# Altium PCB 02_to_07.PcbDoc
Units mil, origin at the board's own origin, x right, y up, seen from the top; angles counter-clockwise.
Board outline 629.92 x 1279.53 mil, 2 copper layers (Top Layer, Bottom Layer); 6 components, 7 nets, 25 pads, 0 vias.
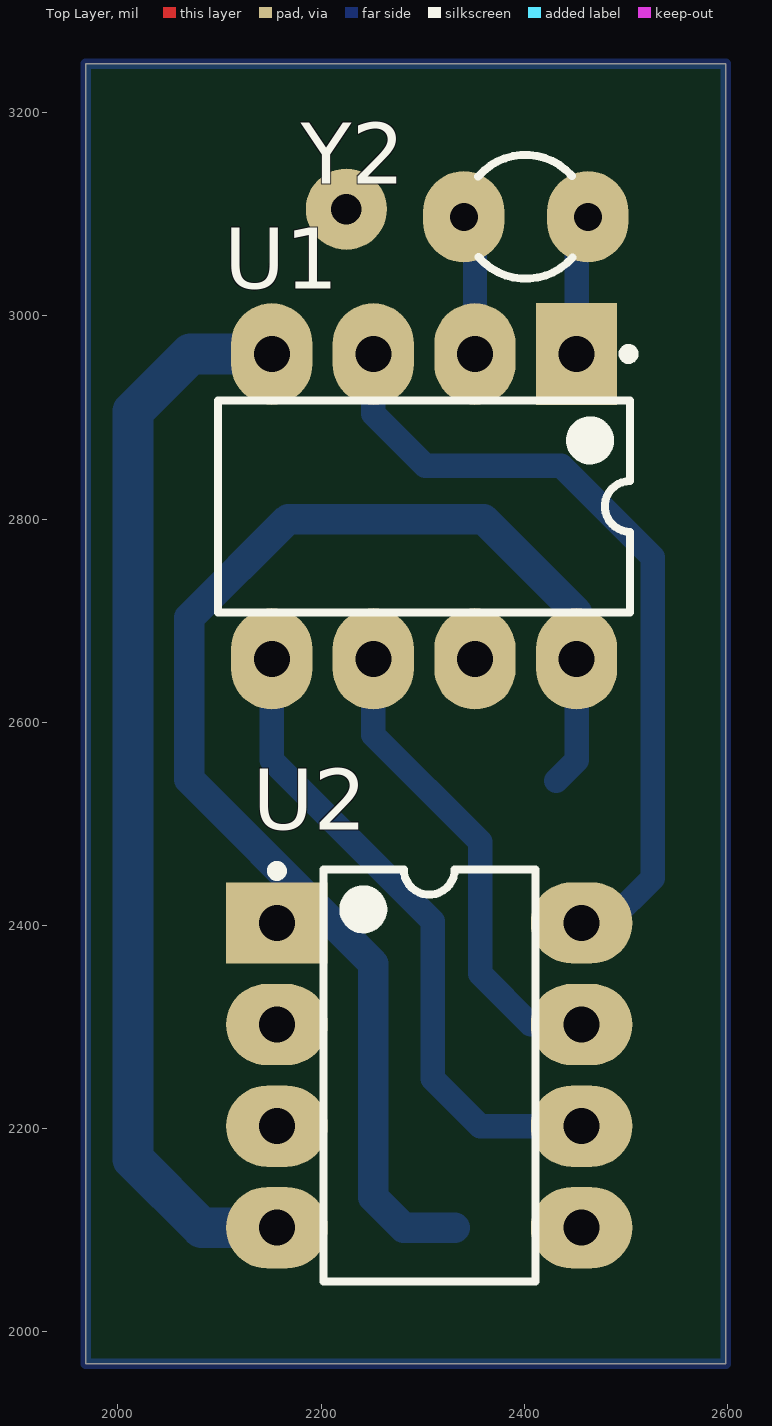
[diagram p0: Top Layer view]
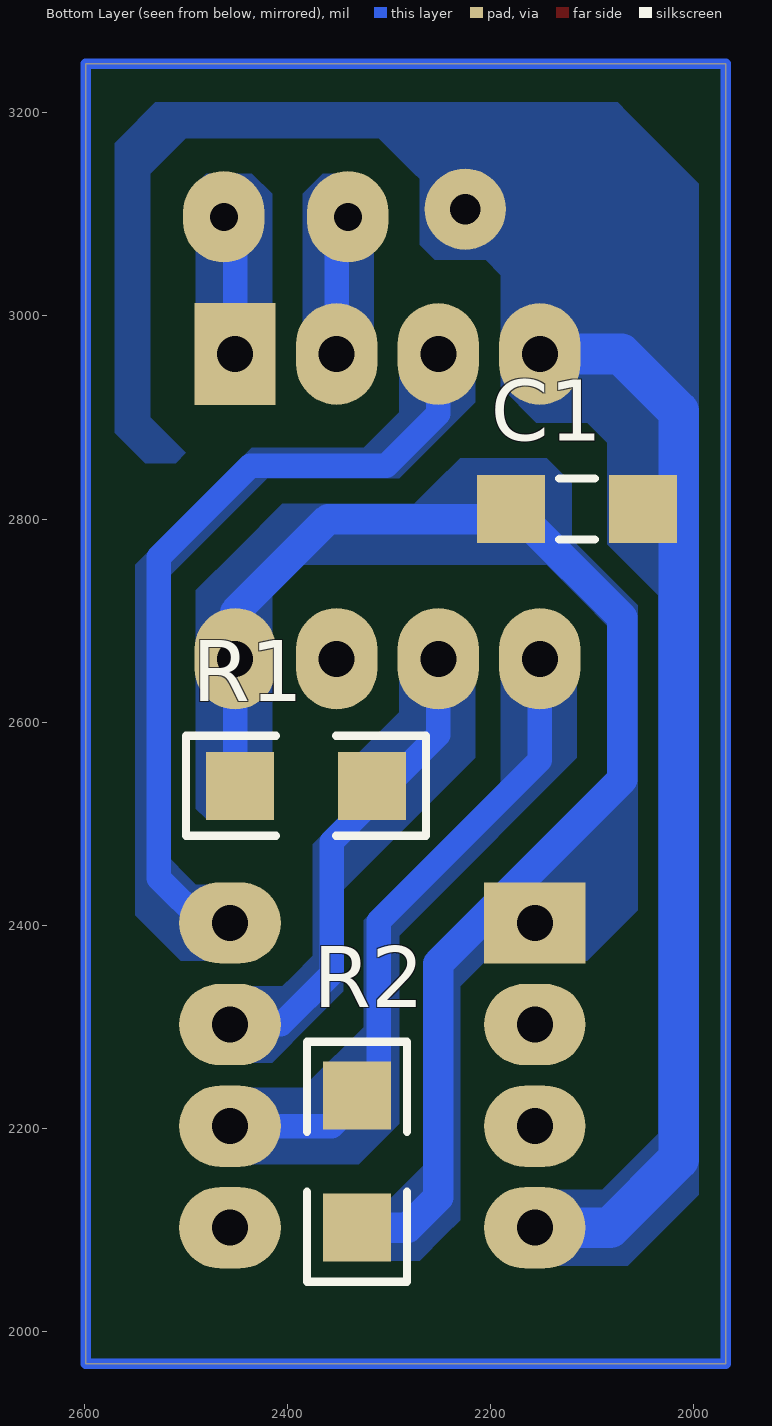
[diagram p1: Bottom Layer view, seen from below]
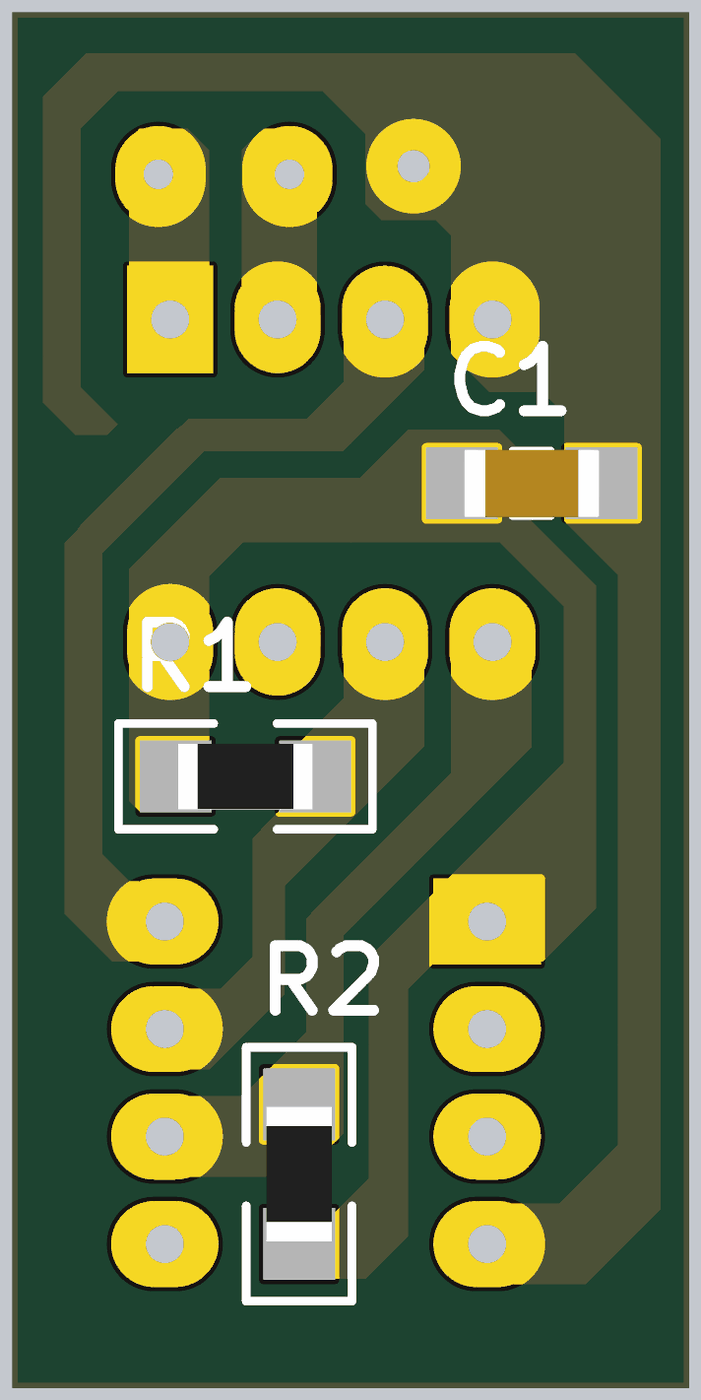
[diagram p2: 3D render of the assembled board from below, using the file's embedded part models]

## Layer stack, top to bottom
Top Layer: signal copper 1.4
Dielectric: dielectric 12.6, FR-4, Dk 4.8
Bottom Layer: signal copper 1.4

## Board outline
1968.5,1968.5 2598.43,1968.5 2598.43,3248.03 1968.5,3248.03

## Design rules (kind name [scope] priority, off if disabled: settings)
Clearance [All] p1: gap=10
PolygonConnect [All] p1: connectstyle=Direct reliefconductorwidth=10 reliefentries=4 polygonreliefangle="90 Angle"
RoutingVias [All] p1: holewidth=28 width=50 viastyle="Through Hole" minholewidth=28 minwidth=50 maxholewidth=28 maxwidth=50
SilkscreenOverComponentPads [All] p1: minsilkscreentomaskgap=10
SolderMaskExpansion [All] p1: expansion=4
Width [All] p1: maxlimit=40 minlimit=18 preferedwidth=24
27 further rules are at their usual default settings.

## Components (designator, comment, footprint, x,y, rotation, side; value= is the part's Value field where it differs from the comment)
C1 ".1uF 1206" C1206 2115,2810 r0 bottom
R1 "1K 1206" R1206 2381.54,2537.44 r0 bottom
R2 "1K 1206" R1206 2331.54,2167.44 r270 bottom
U1 "DS1307" DIP8 2301.54,2812.44 r270 top
U2 "DS1302" DIP8 2306.54,2252.44 r0 top
Y2 "XTAL 32.768KHz 6pF" R38 2401.54,3097.44 r270 top

## Footprints (in the part's own frame and the unit in brackets; to place one, negate y for a bottom-side part, rotate by r counter-clockwise, add the part's x,y. Pads: shape width x height; smd on the part's side, far side on the other; paste and mask are expansions set on the pad)
C1206 [mm] "Chip Capacitor, Body 3.2x1.6mm, IPC High Density"
  rect 1.7x1.7 smd: 1(-1.65,0) 2(1.65,0)
  silkscreen extent -0.44,-0.76 0.44,0.76, body extent -1.6,-0.8 1.6,0.8, height 1
DIP8 [mil] "DIP, 8-Leads, Row Spacing 7.62mm, Pitch 2.54mm, Body 9.65x6.35mm"
  rect 100x80 hole 35.43: 1(-150,150)
  oval 100x80 hole 35.43: 2(-150,50) 3(-150,-50) 4(-150,-150) 5(150,-150) 6(150,-50) 7(150,50) 8(150,150)
  silkscreen extent -155,-203 104,206, body extent -142,-203 142,203, height 174
R38 [mil] "Crystal, Thru-Hole; 2 Leads; Body 3.1 x 8.2 mm (Dia.xH)"
  oval 90x80 hole 27.56: 1(0,61.02) 2(0,-61.02)
  silkscreen extent -61,-47 61,46
R1206 [mm] "Chip Capacitor, Body 3.2x1.6mm, IPC High Density"
  rect 1.7x1.7 smd: 1(-1.65,0) 2(1.65,0)
  silkscreen extent -3,-1.25 3,1.25, body extent -1.59,-0.77 1.59,0.77, height 0.63

## Part data
C1: library part Cap, "Capacitor"
R1 R2: library part Res1, "Resistor"
U1: "64 X 8 Serial Real-Time Clock"
U2: "Trickle Charge Timekeeping Chip"
Y2: library part XTAL, "Crystal Oscillator"

## Free pads (board coordinates)
  round 80 hole 30: 0(2225,3105)

## Nets (pads, with @x,y where several pads share a name; then routed paths per layer and width w, separated by ;. In a path a pad name is that pad's centre, name@x,y a point inside that pad or via, vN(x,y) a via of type N, cw(c..) or ccw(c..) an arc to the next point about the centre after c; other vN are vias at no path point)
GND: C1.1 pad.0 U1.4 U2.4 | length 1065.4
  Bottom Layer w40: U1.4 2071.54,2962.44 2015,2905.91 2015,2170 2082.56,2102.44 U2.4
NetU1_1: U1.1 Y2.1 | length 139.6
  Bottom Layer w24: U1.1 2451.54,3086.42 Y2.1
NetU1_2: U1.2 Y2.2 | length 139.6
  Bottom Layer w24: Y2.2 2351.54,3086.42 U1.2
NetU1_3: U1.3 U2.8 | length 796.6
  Bottom Layer w24: U1.3 2251.54,2903.46 2302.56,2852.44 2436.54,2852.44 2526.54,2762.44 2526.54,2446.54 2482.44,2402.44 U2.8
SCL: R1.1 U1.6 U2.7 | length 474.2
  Bottom Layer w24: U1.6 2251.54,2587.44 2356.54,2482.44 2356.54,2352.44 2406.54,2302.44 U2.7
SDA: R2.1 U1.5 U2.6 | length 644.9
  Bottom Layer w24: U1.5 2151.54,2562.44 2310,2403.98 2310,2248.98 2356.54,2202.44 U2.6
VCC: C1.2 R1.2 R2.2 U1.8 U2.1 | length 1426.6
  Bottom Layer w24: U2.1 2211.54,2402.44 ; R1.2@2431.5,2542.44 2451.54,2562.48 U1.8
  Bottom Layer w30: R2.2 2281.5,2102.48 2251.54,2132.44 2251.54,2362.44 2211.54,2402.44 2070.25,2543.73 2070.25,2702.69 2167.56,2800 2360,2800 2451.54,2708.46 U1.8
pads on no net: U1.7 U2.2 U2.3 U2.5
copper on no net: | length 3818.9
  Bottom Layer w10: 1968.5,1968.5 2598.43,1968.5 2598.43,3248.03 1968.5,3248.03 1968.5,1968.5

## Polygon pours and split planes (outlines as drawn)
SCL on Bottom Layer "Top Layer-No Net" (solid, pour order 18): 2460,2265 2415,2265 2375,2305 2345,2335 2345,2380 2345,2435 2285,2495 2215,2565 2215,2660 2290,2660 2290,2610 2320,2580 2330,2570 2350,2570 2350,2505 2370,2485 2375,2480 2375,2425 2375,2370 2395,2350 2405,2340 2460,2340
NetU1_3 on Bottom Layer "Top Layer-No Net" (solid, pour order 16): 2455,2365 2505,2365 2540,2400 2550,2410 2550,2470 2550,2755 2470,2835 2435,2870 2410,2870 2410,2850 2400,2840 2420,2840 2505,2755 2515,2745 2515,2535 2515,2465 2500,2450 2490,2440 2455,2440
SDA on Bottom Layer "Top Layer-No Net" (solid, pour order 14): 2460,2165 2330,2165 2300,2195 2290,2205 2290,2285 2290,2390 2270,2410 2115,2565 2115,2660 2190,2660 2190,2540 2245,2485 2325,2405 2325,2335 2325,2300 2380,2245 2385,2240 2460,2240
VCC on Bottom Layer "Top Layer-No Net" (solid, pour order 12): 2330,2070 2270,2070 2245,2095 2230,2110 2230,2145 2230,2340 2200,2370 2130,2370 2125,2365 2105,2365 2090,2380 2055,2415 2055,2630 2055,2665 2055,2715 2070,2730 2130,2790 2155,2790 2155,2787.44 2127.56,2760 2070.25,2702.69 2070.25,2690 2070.25,2554.75 2115,2510 2255,2370 2255,2340 2255,2175 2300,2130 2330,2130
NetU1_3 on Bottom Layer "Top Layer-No Net" (solid, pour order 10): 2215,2965 2215,2915 2240,2890 2290,2840 2385,2840 2440,2840 2460,2820 2460,2845 2435,2870 2390,2870 2325,2870 2290,2905 2290,2965
VCC on Bottom Layer "Top Layer-No Net" (solid, pour order 8): 2415,2550 2415,2725 2385,2755 2175,2755 2145,2755 2110,2720 2085,2695 2085,2645 2060,2670 2070.25,2680.25 2070.25,2702.69 2070.25,2720.25 2105,2755 2120,2770 2120,2800 2120,2835 2135,2850 2145,2860 2210,2860 2230,2860 2255,2835 2275,2815 2335,2815 2405,2815 2450,2770 2490,2730 2490,2650 2490,2515 2480,2505 2415,2505
GND on Bottom Layer "Top Layer-No Net" (solid, pour order 6): 2155,2065 2065,2065 1995,2135 1995,2230 1995,3130 2065,3200 2075,3210 2220,3210 2530,3210 2565,3175 2570,3170 2570,2905 2570,2885 2540,2855 2510,2855 2500,2865 2535,2900 2535,3110 2535,3140 2505,3170 2500,3175 2380,3175 2310,3175 2275,3140 2270,3135 2270,3070 2255,3055 2205,3055 2190,3040 2190,2955 2190,2930 2155,2895 2105,2895 2085,2875 2085,2810 2085,2775 2055,2745 2035,2725 2035,2695 2035,2195 2075,2155 2090,2140 2160,2140
NetU1_2 on Bottom Layer "Top Layer-No Net" (solid, pour order 4): 2385,2965 2385,3120 2375,3130 2365,3140 2340,3140 2315,3115 2315,2960
NetU1_1 on Bottom Layer "Top Layer-No Net" (solid, pour order 2): 2415,2995 2415,3120 2435,3140 2480,3140 2490,3130 2490,2990 2415,2990